# Altium PCB PCB111.PcbDoc
Units mil, origin at the board's own origin, x right, y up, seen from the top; angles counter-clockwise.
Board outline 1023.62 x 1299.21 mil, 2 copper layers (Top Layer, Bottom Layer); 3 components, 4 nets, 24 pads, 0 vias.
Unrouted connection lines stored in the file: 1.
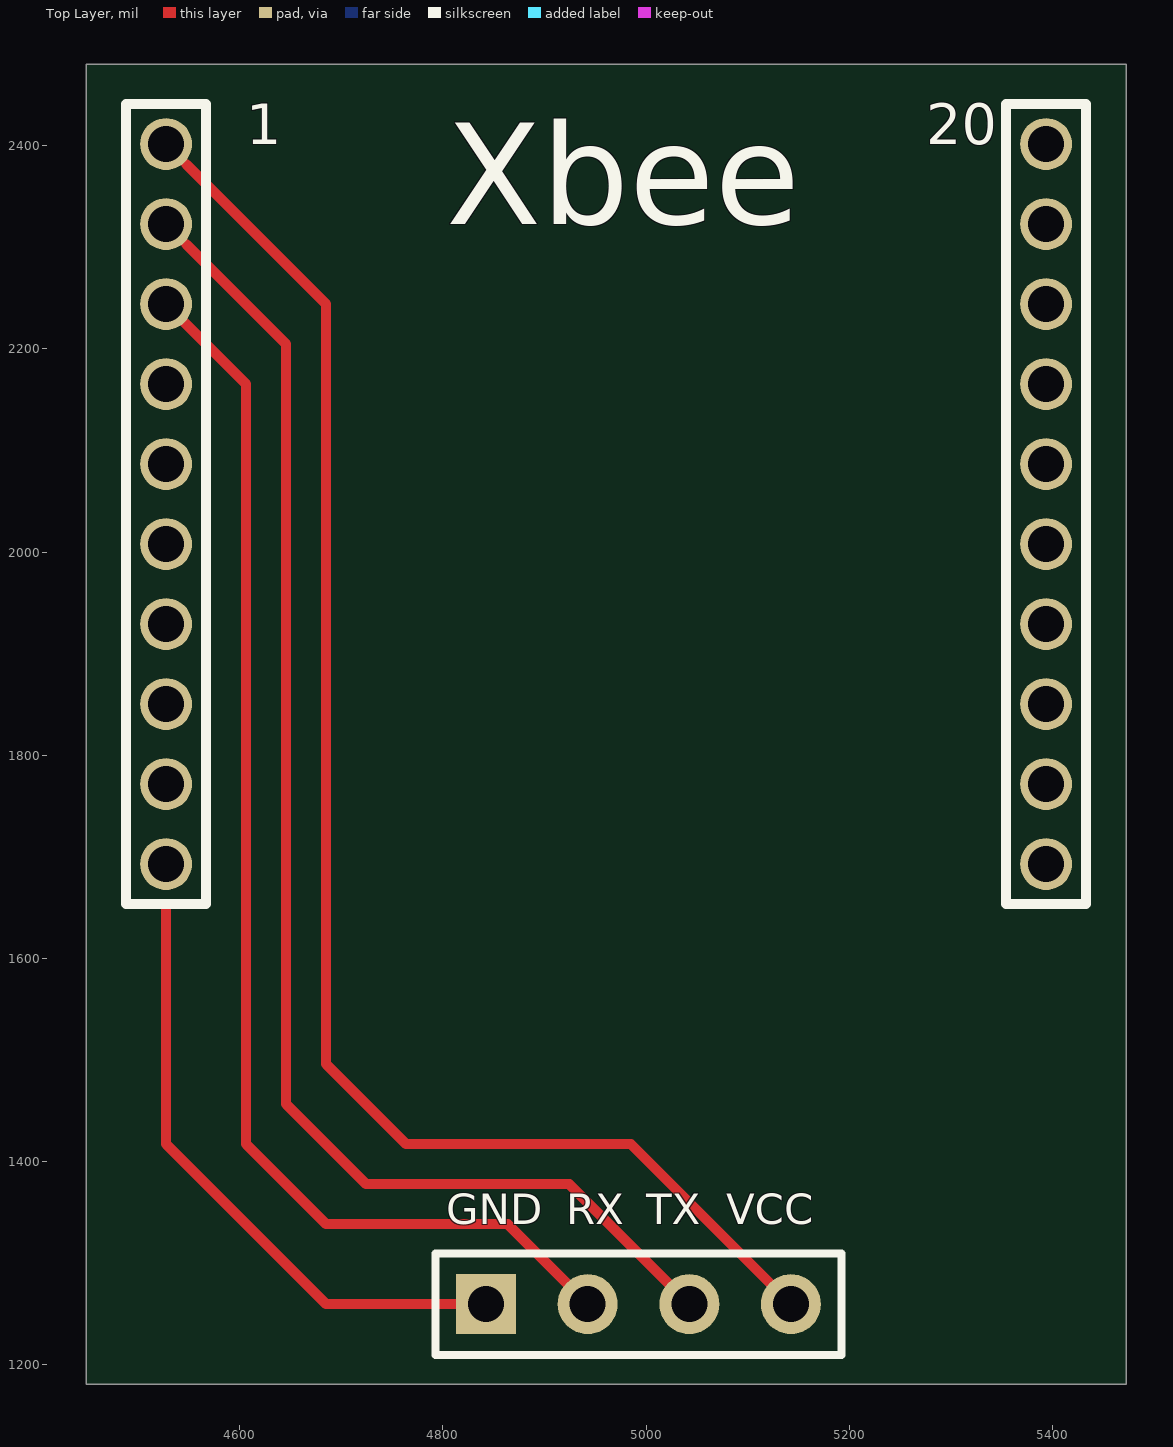
[diagram p0: Top Layer view]
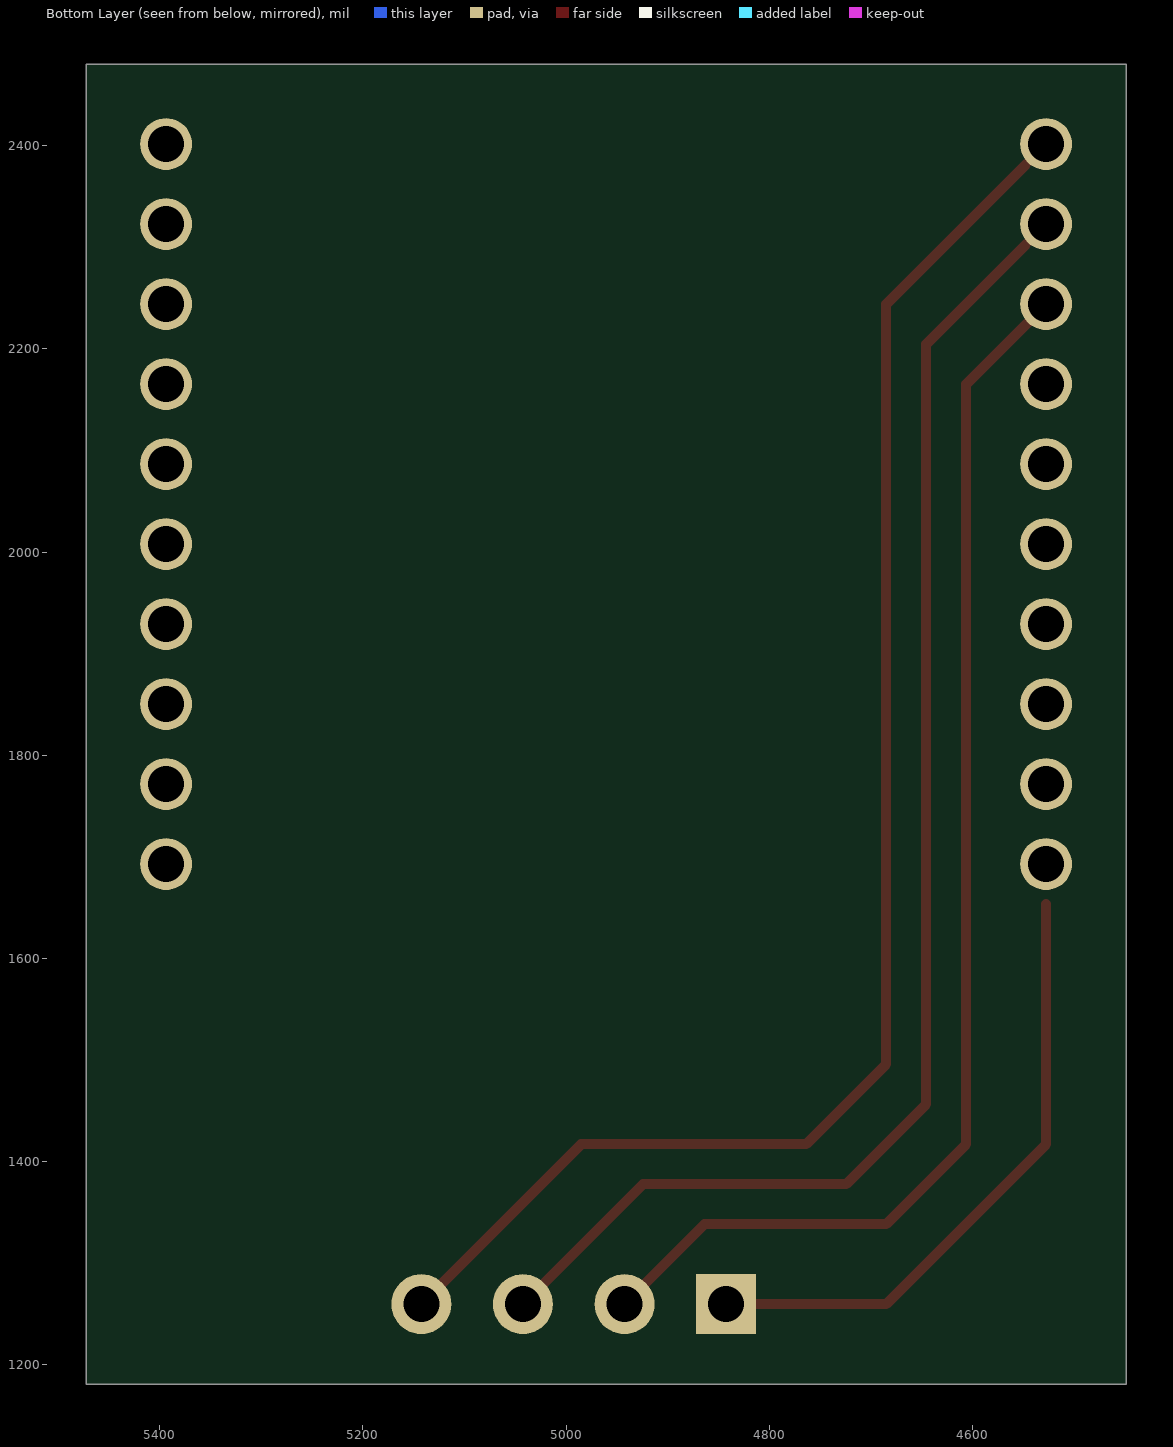
[diagram p1: Bottom Layer view, seen from below]

## Layer stack, top to bottom
Top Layer: signal copper 1.4
Dielectric: dielectric 12.6, FR-4, Dk 4.8
Bottom Layer: signal copper 1.4

## Board outline
4448.82,2480.32 5472.44,2480.32 5472.44,1181.1 4448.82,1181.1

## Design rules (kind name [scope] priority, off if disabled: settings)
Clearance [All] p1: gap=10
PolygonConnect [All] p1: connectstyle=Relief reliefconductorwidth=10 reliefentries=4 polygonreliefangle="90 Angle"
RoutingVias [All] p1: holewidth=28 width=50 viastyle="Through Hole" minholewidth=28 minwidth=50 maxholewidth=28 maxwidth=50
SilkscreenOverComponentPads SilkToSolderMaskClearance [IsPad] p1: minsilkscreentomaskgap=10
SolderMaskExpansion [All] p1: expansion=4
Width [All] p1: maxlimit=10 minlimit=10 preferedwidth=10
27 further rules are at their usual default settings.

## Components (designator, comment, footprint, x,y, rotation, side; value= is the part's Value field where it differs from the comment)
1 "header10 2mm" "header10 2mm big" 4527.56,2401.57 r0 top
20 "header10 2mm" "header10 2mm big" 5393.7,2401.57 r0 top
GND "Header 4" HDR1X4 4842.52,1259.84 r0 top

## Footprints (in the part's own frame and the unit in brackets; to place one, negate y for a bottom-side part, rotate by r counter-clockwise, add the part's x,y. Pads: shape width x height; smd on the part's side, far side on the other; paste and mask are expansions set on the pad)
HDR1X4 [mm] "Connector; Header; 4 Position"
  rect 1.5x1.5 hole 0.9: 1(0,0)
  round 1.5 hole 0.9: 2(2.54,0) 3(5.08,0) 4(7.62,0)
  silkscreen extent -1.27,-1.27 8.89,1.27
"header10 2mm big" [mm]
  round 1.3 hole 0.9: 1(0,0) 2(0,-2) 3(0,-4) 4(0,-6) 5(0,-8) 6(0,-10) 7(0,-12) 8(0,-14) 9(0,-16) 10(0,-18)
  silkscreen extent -1,-19 1,1

## Part data
GND: "Header, 4-Pin"

## Nets (pads, with @x,y where several pads share a name; then routed paths per layer and width w, separated by ;. In a path a pad name is that pad's centre, name@x,y a point inside that pad or via, vN(x,y) a via of type N, cw(c..) or ccw(c..) an arc to the next point about the centre after c; other vN are vias at no path point)
Net1_1: 1.1 GND.4 | length 1498.2
  Top Layer w10: 4547.24,2381.89 4685.04,2244.09 4685.04,1496.06 4763.78,1417.32 4985.04,1417.32 GND.4
Net1_2: 1.2 GND.3 | length 1365.6
  Top Layer w10: 4547.24,2303.15 4645.67,2204.72 4645.67,1456.69 4724.41,1377.95 4924.41,1377.95 GND.3
Net1_3: 1.3 GND.2 | length 1260.8
  Top Layer w10: 1.3 4606.3,2165.35 4606.3,1417.32 4685.04,1338.58 4863.78,1338.58 GND.2
Net1_10: 1.10 GND.1 | length 616.4
  Top Layer w10: 4527.56,1653.54 4527.56,1417.32 4685.04,1259.84 GND.1
pads on no net: 1.4 1.5 1.6 1.7 1.8 1.9 20.1 20.2 20.3 20.4 20.5 20.6 20.7 20.8 20.9 20.10

## Silkscreen, mask and mechanical layers (free items; w line width, h text height)
Top Overlay:
  text "Xbee" at 4803.15,2322.83 h100
  text "RX" at 4921.26,1338.58 h30
  text "TX" at 5000,1338.58 h30
  text "VCC" at 5078.74,1338.58 h30
Mechanical 1:
  the board outline again, w10